# Altium PCB PCB1.PcbDoc
Units mil, origin at the board's own origin, x right, y up, seen from the top; angles counter-clockwise.
Board outline 1600 x 900 mil, 2 copper layers (Top Layer, Bottom Layer); 10 components, 6 nets, 33 pads, 0 vias.
Unrouted connection lines stored in the file: 3.
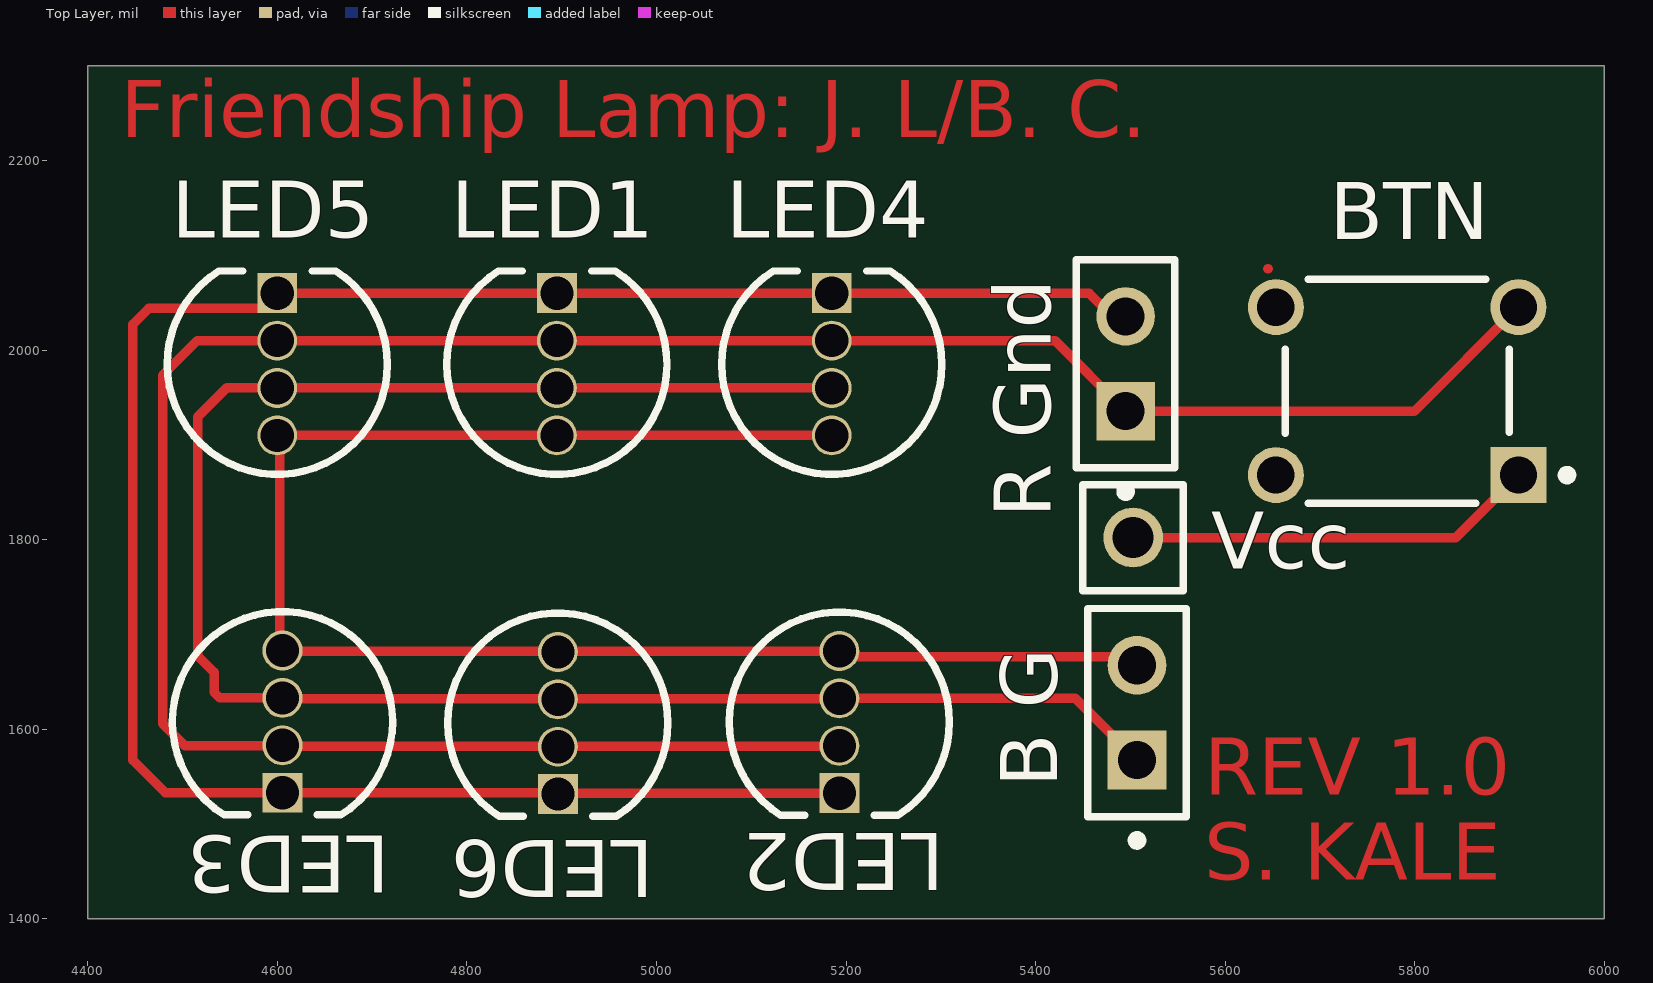
[diagram p0: Top Layer view]
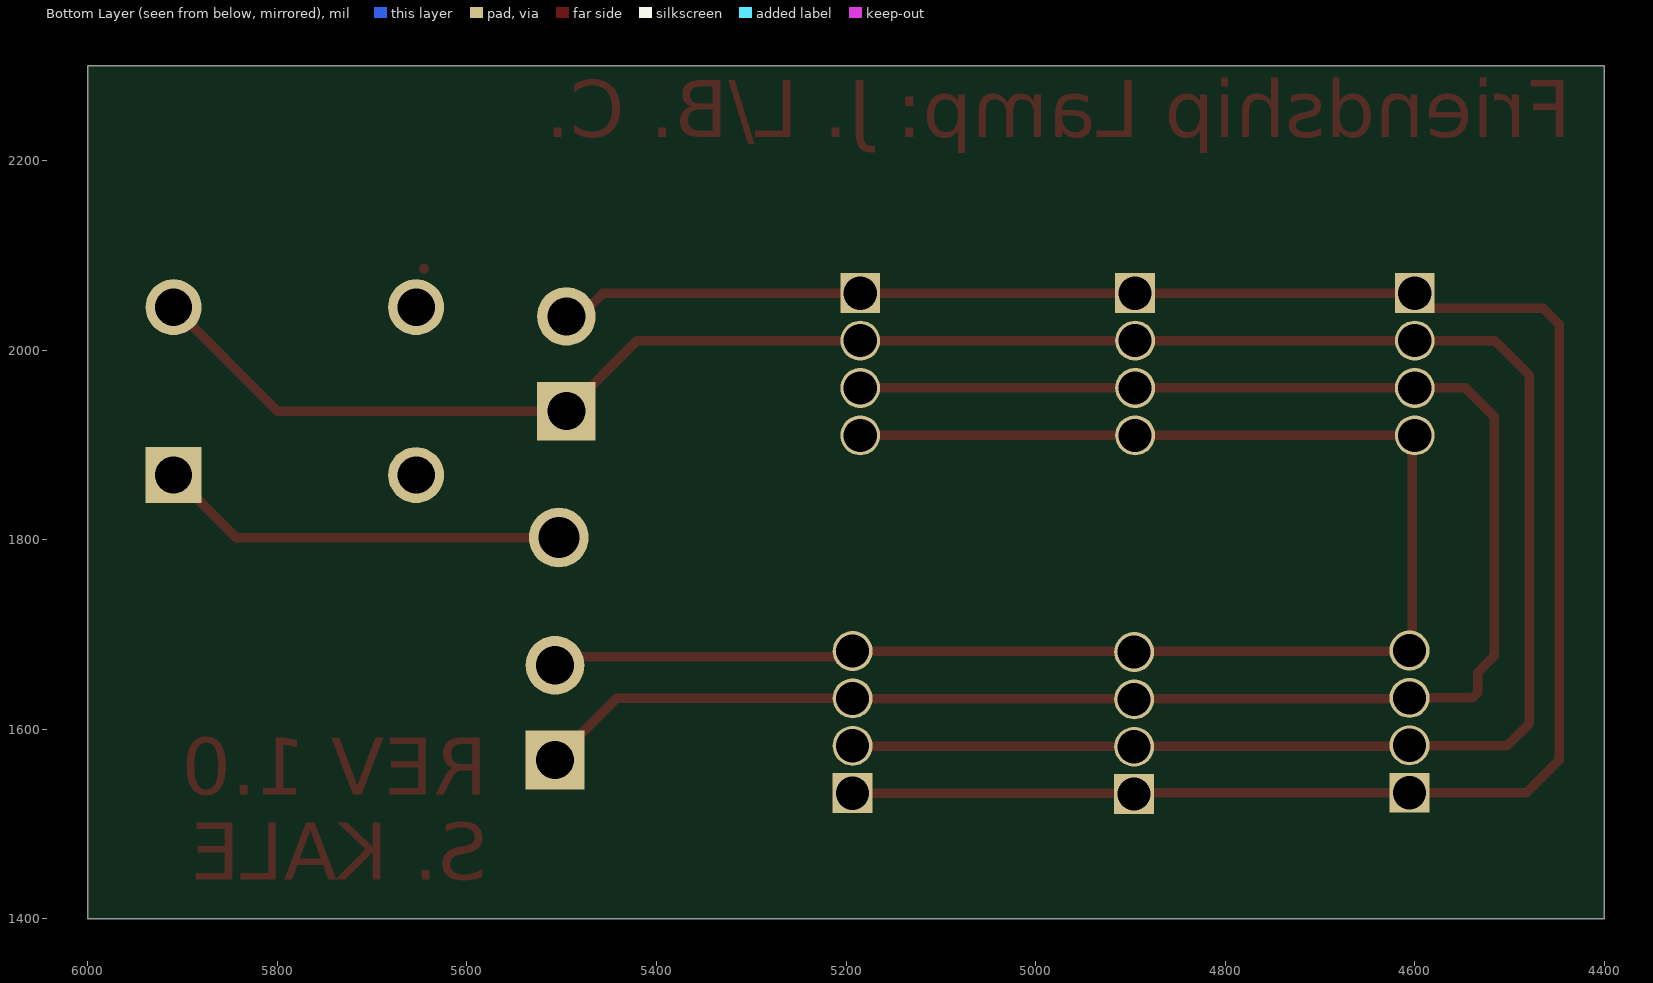
[diagram p1: Bottom Layer view, seen from below]

## Layer stack, top to bottom
Top Solder: solder mask 0.4, Solder Resist, Dk 3.5
Top Layer: signal copper 1.4
Dielectric 1: dielectric 12.6, FR-4, Dk 4.8
Bottom Layer: signal copper 1.4
Bottom Solder: solder mask 0.4, Solder Resist, Dk 3.5

## Board outline
4400,2300 4400,1400 6000,1400 6000,2300

## Design rules (kind name [scope] priority, off if disabled: settings)
Clearance [All] p1: gap=10 ignorepadtopadclearanceinfootprint=FALSE except(0: Arc-Hole Track-Hole SMDPad-Hole THPad-Hole Via-Hole Fill-Hole Poly-Hole Region-Hole Text-Hole)
PolygonConnect [All] p1: connectstyle=Relief reliefconductorwidth=10 reliefentries=4 polygonreliefangle="90 Angle" airgapwidth=10
RoomDefinition Sheet1 [InComponentClass('Sheet1')] p1: confinementstyle=ConfineIn formatcopy=TRUE lockcomponents=FALSE outline 0,0 2000,0 2000,1000 0,1000
RoutingVias [All] p1: holewidth=28 width=50 viastyle="Through Hole" minholewidth=28 minwidth=50 maxholewidth=28 maxwidth=50
SolderMaskExpansion [All] p1: expansion=4 istentingtop=FALSE
Width [All] p1: maxlimit=10 minlimit=10 preferedwidth=10
30 further rules are at their usual default settings.

## Components (designator, comment, footprint, x,y, rotation, side; value= is the part's Value field where it differs from the comment)
"B G" "M20-9990246" FP-M20-9990246-MFG 5507,1617.5 r90 top
BTN "B3F-1000" OMRON-B3F-1000-4_V 5781.5,1956.69 r180 top (schematic designator Button)
LED1 "" KING-WP154A4SUREQBFZGC_V 4895,1985 r0 top
LED2 "" KING-WP154A4SUREQBFZGC_V 5193,1607.5 r180 top
LED3 "" KING-WP154A4SUREQBFZGC_V 4605.5,1608 r180 top
LED4 "" KING-WP154A4SUREQBFZGC_V 5185,1985 r0 top
LED5 "" KING-WP154A4SUREQBFZGC_V 4600,1985 r0 top
LED6 "" KING-WP154A4SUREQBFZGC_V 4896,1606.5 r180 top
"R Gnd" "M20-9990246" FP-M20-9990246-MFG 5495,1985.5 r90 top
Vcc "61300111121" 61300111121 5502.95,1802.17 r270 top (schematic designator "VCC in")

## Footprints (in the part's own frame and the unit in brackets; to place one, negate y for a bottom-side part, rotate by r counter-clockwise, add the part's x,y. Pads: shape width x height; smd on the part's side, far side on the other; paste and mask are expansions set on the pad)
61300111121 [mm] "Pin Header, pitch 2.54 mm, THT, Vertical, single row, 1p"
  round 1.6 hole 1.1: 1(0,0)
  silkscreen extent -1.42,-1.35 1.42,1.35, body extent -1.27,-1.27 1.27,1.27, height 8.57
FP-M20-9990246-MFG [mm]
  rect 1.57x1.57 hole 1.02 paste-1000 mask+0: 1(-1.27,0)
  round 1.57 hole 1.02 paste-1000 mask+0: 2(1.27,0)
  silkscreen extent -3.55,-1.32 2.79,1.32, body extent -2.89,-1.42 2.89,1.42, height 0.25
KING-WP154A4SUREQBFZGC_V [mm] "THD, 4-Leads, Dia 5.9mm, Pitch 1.27mm"
  rect 1.07x1.07 hole 0.889 paste+0: 1(0,1.905)
  round 1.07 hole 0.889 paste+0: 2(0,0.635) 3(0,-0.635) 4(0,-1.905)
  silkscreen extent -2.95,-2.95 2.95,2.5
OMRON-B3F-1000-4_V [mm] "TH, 4-Leads, Body 6x6mm"
  rect 1.5x1.5 hole 1 paste+0: 1(-3.25,2.25)
  round 1.5 hole 1 paste+0: 2(3.25,2.25) 4(3.25,-2.25)
  round 1.5 hole 1 paste+0 mask+0.102: 3(-3.25,-2.25)
  silkscreen extent -4.68,-3 3,3, body extent -3,-3 3,3, height 4.5

## Part data
"B G" "R Gnd": library part CMP-15831-000009-1, "CONN HEADER VERT 2POS 2.54MM", Current Rating=3A, Manufacturer=Harwin, Temperature="-40°C to +105°C", Temperature Range High=+105°C, Temperature Range Low=-40°C, Automotive=No, Category=Conn, ComponentLink2Description=Datasheet, ComponentLink2URL=https://cdn.harwin.com/pdfs/M20-999.pdf, Conn Gender=Male, Conn Orientation=Vertical, Contact Material=Tin,Nickel, Device Class L1=Connectors, Device Class L2="Headers and Wire Housings", Device Class L3=unset, Digikey Description="CONN HEADER VERT 2POS 2.54MM", Height=8.99mm, Lead Free=Yes, Manufacturer Part Number=M20-9990246, Mouser Description="2.54mm (0.1\") Pitch SIL Vertical PC Tail Pin Header, 6.1mm mating pin height, tin, 2 contacts", Number Of Contacts=2, Number Of Rows=1, Octopart=https://octopart.com/m20-9990246-harwin-2590635, Package=M20-9990246, Pitch=2.54mm, RoHS=TRUE
BTN: library part CMP-1677-00002-1, "Tactile Switch, SPST-NO, 0.05 A, 5 to 24 V, -25 to 70 degC, 4-Pin THD, RoHS, Bulk", Capacitance="-45 f", Current Rating="1.5 A", Max Operating Temperature="70 degC", Min Operating Temperature="-40 degC", Package Quantity=1080, Voltage Rating="150 V", ComponentLink1Description="Manufacturer URL", ComponentLink1URL=http://www.omron.com/, ComponentLink2Description=Datasheet, ComponentLink2URL=http://www.omron.com/ecb/products/pdf/en-b3f.pdf, Contact Material=Brass, Contact Plating=Gold, DatasheetVersion=Jan-15, Gender=Female, Height="14.99 mm", Lead Pitch="1.27 mm", Length="18.34 mm", Mount="Through Hole", PackageDescription="4-Pin Through Hole Device, Body 6 x 6 mm", PackageReference=B3F-1000, Packaging=Tray, Pins=8, Radiation Hardening=No, RoHSCompliant=true, Shielding=Shielded, Width="25.4 mm"
LED1 LED2 LED3 LED4 LED5 LED6: library part CMP-2000-07415-1, "Full Color LED Lamp, Dominant Wavelength RGB 630 / 525 / 465 nm, -40 to 85 degC, 4-Pin THD, RoHS", Color=Red,Green,Blue(RGB), Current - Test=20mA, Manufacturer=Kingbright, Millicandela Rating=1300mcdRed,1700mcdGreen,900mcdBlue, Package / Case=Radial-4Leads, Package Description="4-Pin Through Hole LED, Dia 5.9 mm, Pitch 1.27 mm", Package Reference=WP154A4SUREQBFZGC, Standard Package=500, Voltage - Forward (Vf) (Typ)=1.9VRed,3.3VGreen,3.3VBlue, 3D Model="WP154A4SUREQBFZGW.sldprt /  / WP154A4SUREQBFZGW.pro /  / WP154A4SUREQBFZGW.igs /  / WP154A4SUREQBFZGW.stp", Category=Optoelectronics, Datasheet URL=https://www.kingbrightusa.com/images/catalog/spec/WP154A4SUREQBFZGC.pdf, Datasheet Version="Rev. 5A, 08/2014", Family=LEDIndication-Discrete, Height=8.60mm, Lens Style/Size=RoundwithDomedTop,5mm,T-13/4, Lens Type=Clear, Manufacturer URL=http://www.kingbright.com/, Mounting Technology=ThroughHole, Mounting Type=ThroughHole, Online Catalog=5mm,T-13/4(RGB)RoundwithDomedTopLEDLamp, Other Names="754-1615 / WP154A4SUREQBFZGC-ND", Packaging=Bulk, Viewing Angle=50°, Wavelength - Dominant=630nm,525nm,465nm, Wavelength - Peak=645nm,515nm,460nm
Vcc: library part CMP-1502-01058-1, "THT Vertical Pin Header WR-PHD, Pitch 2.54 mm, Single Row, 1 pins", Contact Resistance=20mOhm, Manufacturer="Wurth Elektronik", Operating Temperature=-40to105degC, Rated Current=3A, Withstanding Voltage=500VAC, Working Voltage=250VAC, Datasheet URL=https://katalog.we-online.de/em/datasheet/6130xx11121.pdf, Gender=Male, Manufacturer URL=http://www.we-online.de, Mounting Technology=THT, Orientation=Vertical, Package Reference=61300111121, Packaging=Bag, Part Number=61300111121, Pin Number=1, Pitch=2.54mm, Publisher=WurthElektronik, Row Number=Single

## Nets (pads, with @x,y where several pads share a name; then routed paths per layer and width w, separated by ;. In a path a pad name is that pad's centre, name@x,y a point inside that pad or via, vN(x,y) a via of type N, cw(c..) or ccw(c..) an arc to the next point about the centre after c; other vN are vias at no path point)
GND: "R Gnd.1" BTN.3 LED1.2 LED2.2 LED3.2 LED4.2 LED5.2 LED6.2 | length 2614.9
  Top Layer w10: LED2.2 5192.5,1582 4896.5,1582 LED6.2 4895.25,1582.25 4606.25,1582.25 LED3.2 4605,1582.5 4502.5,1582.5 4479,1606 4479,1973.5 4515.5,2010 LED5.2 LED1.2 LED4.2 5420.5,2010 5495,1935.5 5799.67,1935.5 BTN.3 ; 5645.13,2085.63 5645.67,2085.63
"NetB G_1": "B G.1" LED1.3 LED2.3 LED3.3 | length 1983.4
  Top Layer w10: 5185,1960 LED1.3 4600,1960 4546.5,1960 4516,1929.5 4516,1677.5 4533.5,1660 4533.5,1638.86 4539.36,1633 LED3.3 4606.25,1632.25 4895.25,1632.25 4896,1631.5 4896.5,1632 5192.5,1632 LED2.3 5442,1632.5 5507,1567.5
"NetB G_2": "B G.2" LED1.4 LED2.4 LED3.4 LED4.4 LED5.4 LED6.4 | length 1723
  Top Layer w10: LED4.4 LED1.4 LED5.4 4602.75,1907.25 4602.75,1685.75 LED3.4 4606.25,1682.25 4895.25,1682.25 LED6.4 4896.5,1682 5192.5,1682 LED2.4 5199.15,1676.35 5498.15,1676.35 5507,1667.5
NetButton_1: BTN.1 Vcc.1 | length 433.8
  Top Layer w10: Vcc.1 5843.5,1802.17 BTN.1
NetLED1_1: "R Gnd.2" LED1.1 LED2.1 LED3.1 LED4.1 LED5.1 LED6.1 | length 2291.6
  Top Layer w10: LED2.1 4897,1532.5 LED6.1 4894.5,1533 LED3.1 4482,1533 4447.5,1567.5 4447.5,2027 4464.44,2043.94 4583.94,2043.94 LED5.1 LED1.1 LED4.1 5456.48,2060 5480.98,2035.5 5495,2035.5
NetLED4_3: LED4.3 LED5.3 LED6.3
pads on no net: BTN.2 BTN.4

## Other copper
Top Layer:
  text "Friendship Lamp: J. L/B. C." at 4435,2224.49 h60
  text "REV 1.0 / S. KALE" at 5577.76,1440.94 h60